# Altium PCB MainPCB.PcbDoc
Units mil, origin at the board's own origin, x right, y up, seen from the top; angles counter-clockwise.
Board outline 956.69 x 1267.72 mil, 2 copper layers (Top Layer, Bottom Layer); 3 components, 3 nets, 40 pads, 0 vias.
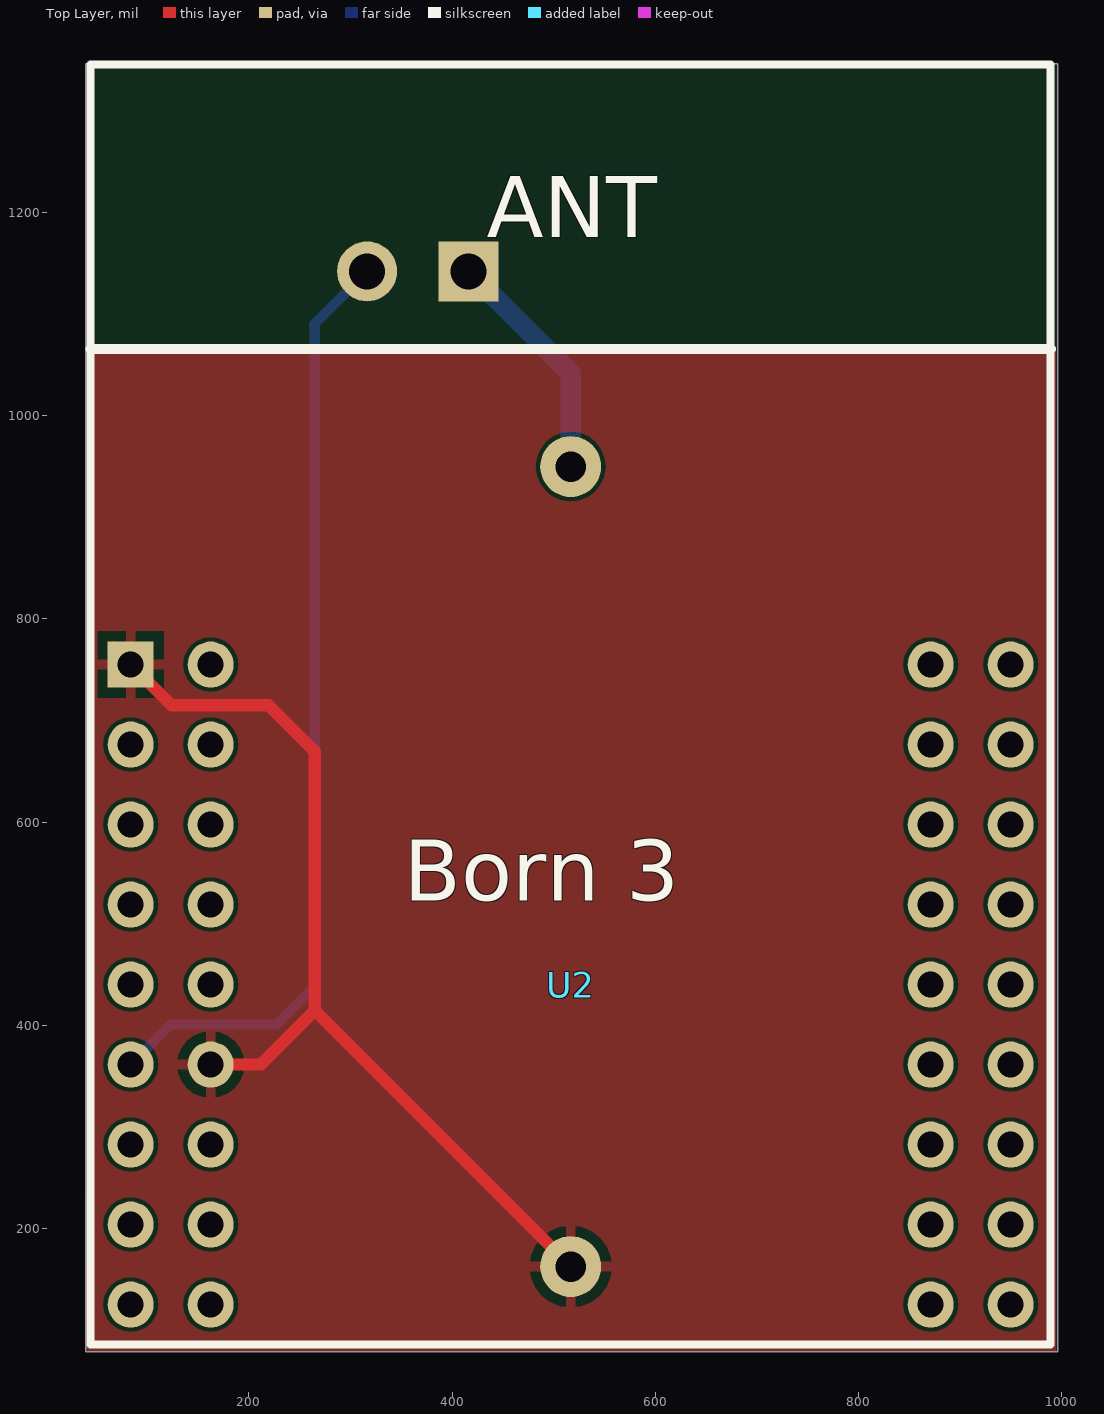
[diagram p0: Top Layer view]
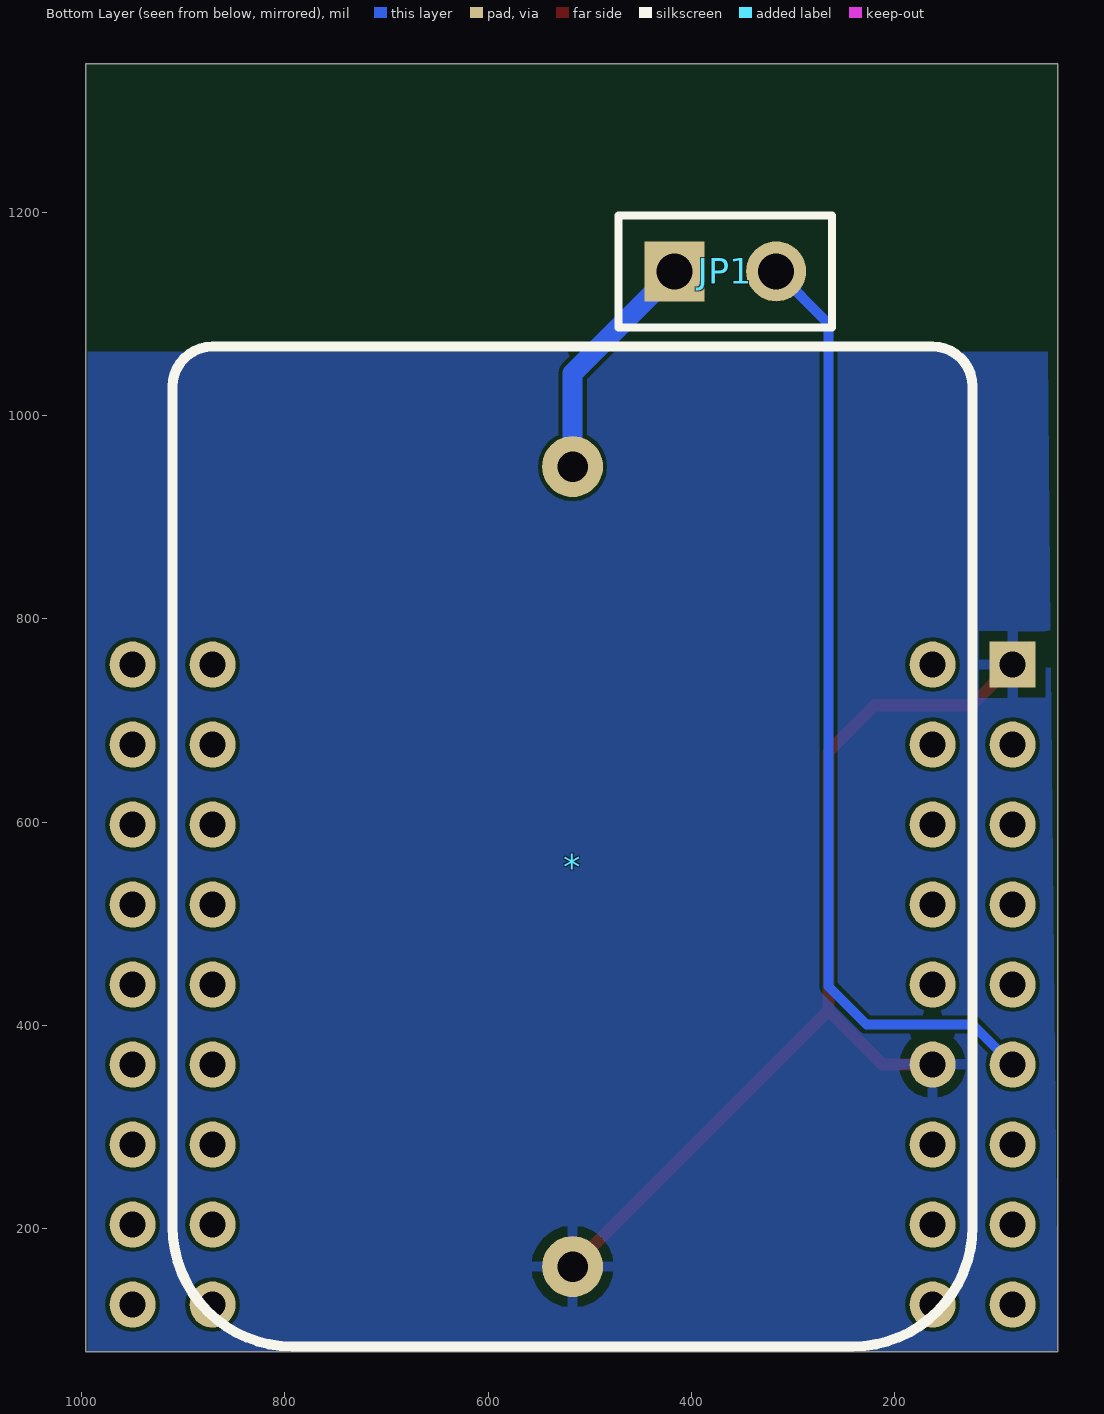
[diagram p1: Bottom Layer view, seen from below]

## Layer stack, top to bottom
Top Solder: solder mask 0.4, Solder Resist, Dk 3.5
Top Layer: signal copper 1.4
Dielectric 1: dielectric 12.6, FR-4, Dk 4.8
Bottom Layer: signal copper 1.4
Bottom Solder: solder mask 0.4, Solder Resist, Dk 3.5

## Board outline
39.37,78.74 39.37,1346.46 996.06,1346.46 996.06,78.74

## Design rules (kind name [scope] priority, off if disabled: settings)
Clearance [All] p1: gap=4 ignorepadtopadclearanceinfootprint=FALSE
HoleSize [All] p1: absolutevalues=TRUE maxlimit=393.7 minlimit=1 maxpercent=80.000 minpercent=20.000
MinimumSolderMaskSliver [All] p1: minsoldermaskwidth=3.94
PlaneClearance [All] p1: clearance=40
PolygonConnect [All] p1: connectstyle=Relief reliefconductorwidth=10 reliefentries=4 polygonreliefangle="90 Angle" airgapwidth=10
RoutingVias [All] p1: holewidth=15 width=30 viastyle="Through Hole" minholewidth=15 minwidth=30 maxholewidth=25 maxwidth=50
SilkToSolderMaskClearance [IsPad] p1: minsilkscreentomaskgap=3.94 clearancetoexposedcopper=TRUE
SolderMaskExpansion [All] p1: expansion=4
Width [All] p1: maxlimit=50 minlimit=10 preferedwidth=10
26 further rules are at their usual default settings.

## Components (designator, comment, footprint, x,y, rotation, side; value= is the part's Value field where it differs from the comment)
* "BCR20H5" BCR20H5 910.51,83.74 r180 bottom
JP1 "JUMPER2" BARRETTE_2_M_D 416.42,1142.06 r180 bottom
U2 "MOD51822" MOD51822 44.37,85.72 r0 top

## Footprints (in the part's own frame and the unit in brackets; to place one, negate y for a bottom-side part, rotate by r counter-clockwise, add the part's x,y. Pads: shape width x height; smd on the part's side, far side on the other; paste and mask are expansions set on the pad)
BARRETTE_2_M_D [mm] "BARRETTE 2 CONTACTS ; 1 RANGEE ; DROITE ; MALE ; ESPACEMENT BROCHES = 2.54 mm"
  rect 1.5x1.5 hole 0.9: 1(0,0)
  round 1.5 hole 0.9: 2(2.54,0)
  silkscreen extent -1.4,-1.4 3.94,1.4, body extent -1.3,-1.2 3.78,1.3, height 8.55
BCR20H5 [mil]
  round 60 hole 30: 1(393.7,866.14) 2(393.7,78.74)
  silkscreen extent 0,0 787,984
MOD51822 [mm]
  rect 1.15x1.15 hole 0.65: 1(1,17)
  round 1.15 hole 0.65: 2(3,17) 3(1,15) 4(3,15) 5(1,13) 6(3,13) 7(1,11) 8(3,11) 9(1,9) 10(3,9) 11(1,7) 12(3,7) 13(1,5) 14(3,5) 15(1,3) 16(3,3) 17(1,1) 18(3,1) 19(21,1) 20(23,1) 21(21,3) 22(23,3) 23(21,5) 24(23,5) 25(21,7) 26(23,7) 27(21,9) 28(23,9) 29(21,11) 30(23,11) 31(21,13) 32(23,13) 33(21,15) 34(23,15) 35(21,17) 36(23,17)
  silkscreen extent 0,0 24,32

## Part data
JP1: "BARRETTE 2 CONTACTS 1 RANGEE MALE DROITE", Type=JUMPER2

## Nets (pads, with @x,y where several pads share a name; then routed paths per layer and width w, separated by ;. In a path a pad name is that pad's centre, name@x,y a point inside that pad or via, vN(x,y) a via of type N, cw(c..) or ccw(c..) an arc to the next point about the centre after c; other vN are vias at no path point)
GND: *.2 U2.1 U2.12 | length 975.7
  Top Layer w12: U2.1@67.1,771.65 U2.1 123.84,714.91 219.31,714.91 264.84,669.38 264.84,414.45 ; U2.12 211.71,361.31 264.84,414.45 ; *.2 264.84,414.45
Net*_1: *.1 JP1.1 | length 233.8
  Bottom Layer w20: JP1.1 516.81,1041.66 *.1
NetJP1_2: JP1.2 U2.11 | length 938.2
  Bottom Layer w10: U2.11 123.11,400.68 227.44,400.68 264.84,438.08 264.84,1090.48 JP1.2
pads on no net: U2.2 U2.3 U2.4 U2.5 U2.6 U2.7 U2.8 U2.9 U2.10 U2.13 U2.14 U2.15 U2.16 U2.17 U2.18 U2.19 U2.20 U2.21 U2.22 U2.23 U2.24 U2.25 U2.26 U2.27 U2.28 U2.29 U2.30 U2.31 U2.32 U2.33 U2.34 U2.35 U2.36

## Polygon pours and split planes (outlines as drawn)
GND on Top Layer "Top Layer-GND" (solid, pour order 2): 47.24,1062.99 994.09,1062.99 994.09,78.74 39.37,78.74
no net on Top Layer "Top Layer-No Net" (solid, pour order 0): 47.24,1062.99
GND on Bottom Layer "Bottom Layer-GND" (solid, pour order 6): 49.21,1062.99 994.09,1062.99 994.09,78.74 39.37,78.74
no net on Bottom Layer "Bottom Layer-No Net" (solid, pour order 4): 49.21,1062.99

## Silkscreen, mask and mechanical layers (free items; w line width, h text height)
Top Overlay:
  text "Born 3" at 352.44,522.72 h60
Mechanical 1:
  lines w10: 39.37,78.74 984.25,78.74 996.06,78.74 996.06,1346.46 39.37,1346.46 39.37,78.74

## Text inside footprints (layer, text, board x,y; h text height)
U2: Top Overlay "ANT" at 434.37,1175.72 h60